# EAGLE board Gameduino 2 Player (EAGLE 7.6.0)

Size 73.58 x 114.19 mm. Coordinates in mm from the lower left corner, seen from the top.
Outline: 0,0 56.82,0 56.82,53.33 0,53.33 0,0
Copper layers (1*16): Top 0.035mm / dielectric 1.5mm / Bottom 0.035mm
Design rules "default": minimum track width 10mil, minimum drill 24mil, track to track 8mil, track to pad 8mil, pad to pad 8mil, via to via 8mil, smd to smd 8mil, copper to edge 40mil, drill to drill 8mil, minimum pad ring 10mil, minimum via ring 8mil, stop-mask expansion 4mil, vias tented up to drill 0mil, thermal gap 10mil

## Footprints (pad centres in the part's own frame; a part is rotated, then mirrored left to right if it is on the bottom)
0207/10 = drill 0.813 octagon: 1 -5.08,0; 2 5.08,0
B25V = drill 0.813 long: A 2.54,0.635; E -2.54,0.635; S 0,0.635
TL1105 = drill 1 pad 1.676: 1 -2.25,3.25; 2 2.25,3.25; 3 -2.25,-3.25; 4 2.25,-3.25
ARDUINO_UNO = drill 1.016 pad 1.88: 0 63.5,50.8; 1 60.96,50.8; 2 58.42,50.8; 3 55.88,50.8; 3.3V 35.56,2.54; 4 53.34,50.8; 5 50.8,50.8; 5V 38.1,2.54; 6 48.26,50.8; 7 45.72,50.8; 8 41.656,50.8; 9 39.116,50.8; 10 36.576,50.8; 11 34.036,50.8; 12 31.496,50.8; 13 28.956,50.8; A0 50.8,2.54; A1 53.34,2.54; A2 55.88,2.54; A3 58.42,2.54; A4 60.96,2.54; A5 63.5,2.54; AREF 23.876,50.8; GND 26.416,50.8; GND. 43.18,2.54; GND.. 40.64,2.54; I/OREF 30.48,2.54; N/C 27.94,2.54; RESET 33.02,2.54; SCL 18.796,50.8; SDA 21.336,50.8; VIN 45.72,2.54 | hole 3.2: 66.04,7.62; 66.04,35.56; 15.24,50.8; 13.97,2.54
1X16P-2.54-2.54-11.6-3.0-BLACK-MALE = drill 0.889 pad 1.651 square: 1 0,19.05 | drill 0.889 pad 1.651: 2 0,16.51; 3 0,13.97; 4 0,11.43; 5 0,8.89; 6 0,6.35; 7 0,3.81; 8 0,1.27; 9 0,-1.27; 10 0,-3.81; 11 0,-6.35; 12 0,-8.89; 13 0,-11.43; 14 0,-13.97; 15 0,-16.51; 16 0,-19.05

## Placement (x,y rotation side)
R1  220‎Ω  [0207/10]  5,48.18 0 top
R2  10k‎Ω  [0207/10]  5,137.08 0 top  (outside the outline)
R3  220‎Ω  [0207/10]  5,98.98 0 top
R4  10k‎Ω  [0207/10]  5,200.58 0 top  (outside the outline)
R5  10k‎Ω  [0207/10]  5,213.28 0 top  (outside the outline)
R6  10k‎Ω  [0207/10]  5,225.98 0 top  (outside the outline)
R7  10k‎Ω  [0207/10]  5,365.68 0 top  (outside the outline)
R8  10k‎Ω  [0207/10]  5,238.68 0 top  (outside the outline)
R9  10k‎Ω  [0207/10]  5,264.08 0 top  (outside the outline)
R10  10k‎Ω  [0207/10]  5,289.48 0 top  (outside the outline)
R11  10k‎Ω  [0207/10]  5,314.88 0 top  (outside the outline)
R12  10k‎Ω  [0207/10]  5,340.28 0 top  (outside the outline)
Rpot1  250k‎Ω  [B25V]  5,35.48 0 top
Rpot3  250k‎Ω  [B25V]  5,86.28 0 top
S1  [TL1105]  5,111.68 0 top
S2  [TL1105]  5,124.38 0 top  (outside the outline)
S3  [TL1105]  5,149.78 0 top  (outside the outline)
S4  [TL1105]  5,162.48 0 top  (outside the outline)
S5  [TL1105]  5,175.18 0 top  (outside the outline)
S6  [TL1105]  5,187.88 0 top  (outside the outline)
S7  [TL1105]  5,251.38 0 top  (outside the outline)
S8  [TL1105]  5,276.78 0 top  (outside the outline)
S9  [TL1105]  5,302.18 0 top  (outside the outline)
S10  [TL1105]  5,327.58 0 top  (outside the outline)
S11  [TL1105]  5,352.98 0 top  (outside the outline)
U1  [ARDUINO_UNO]  5,10.08 0 top
U2  [1X16P-2.54-2.54-11.6-3.0-BLACK-MALE]  5,22.78 0 top
U5  [ARDUINO_UNO]  5,60.88 0 top
U6  [1X16P-2.54-2.54-11.6-3.0-BLACK-MALE]  5,73.58 0 top

## Library data of the parts
R1-R12 Rpot1 Rpot3 S1-S11 U1 U2 U5 U6 = AUTODESK_CIRCUITS_BREADBOARD

## Nets
N$1: R2.1 R4.1 R5.1 R6.1 R7.1 R8.1 R9.1 R10.1 R11.1 R12.1 Rpot1.E Rpot3.E S1.3 U1.GND.. U2.1 U2.5 U2.16 U5.GND.. U6.1 U6.5 U6.16
N$2: U1.7 U2.4
N$3: U1.6 U2.6
N$4: U1.5 U2.11
N$5: U1.4 U2.12
N$6: U1.3 U2.13
N$7: U1.2 U2.14
N$8: Rpot1.S U2.3
N$9: R1.2 U2.15
N$10: R1.1 Rpot1.A U1.5V U2.2
N$11: U5.7 U6.4
N$12: U5.6 U6.6
N$13: U5.5 U6.11
N$14: U5.4 U6.12
N$15: U5.3 U6.13
N$16: U5.2 U6.14
N$17: Rpot3.S U6.3
N$18: R3.2 U6.15
N$19: U1.0 U5.1
N$20: U1.1 U5.0
N$21: R3.1 Rpot3.A U5.5V U6.2
N$22: R2.2 S2.3
N$23: S2.4 U1.A0 U5.A0
N$24: S1.4 U1.RESET U5.RESET
N$25: R4.2 S3.3
N$26: R5.2 S4.3
N$27: R6.2 S6.3
N$28: R8.2 S5.3
N$29: S7.4 U1.A5
N$30: S8.4 U1.A4
N$31: S10.4 U1.A3
N$32: S9.4 U1.A2
N$33: S3.4 U5.A5
N$34: S4.4 U5.A4
N$35: S5.4 U5.A3
N$36: S6.4 U5.A2
N$37: S11.4 U1.A1 U5.A1

## Tracks (layer width: path | path; a pad name or v marks a point on that pad's centre or on a via)
N$1  (20 unrouted)
N$2  (1 unrouted)
N$3  (1 unrouted)
N$4  (1 unrouted)
N$5  (1 unrouted)
N$6  (1 unrouted)
N$7  (1 unrouted)
N$8  (1 unrouted)
N$9  (1 unrouted)
N$10  (3 unrouted)
N$11  (1 unrouted)
N$12  (1 unrouted)
N$13  (1 unrouted)
N$14  (1 unrouted)
N$15  (1 unrouted)
N$16  (1 unrouted)
N$17  (1 unrouted)
N$18  (1 unrouted)
N$19  (1 unrouted)
N$20  (1 unrouted)
N$21  (3 unrouted)
N$22  (1 unrouted)
N$23  (2 unrouted)
N$24  (2 unrouted)
N$25  (1 unrouted)
N$26  (1 unrouted)
N$27  (1 unrouted)
N$28  (1 unrouted)
N$29  (1 unrouted)
N$30  (1 unrouted)
N$31  (1 unrouted)
N$32  (1 unrouted)
N$33  (1 unrouted)
N$34  (1 unrouted)
N$35  (1 unrouted)
N$36  (1 unrouted)
N$37  (2 unrouted)